# Altium PCB StLink.PcbDoc (part 3 of 3)
Units mm, origin at the board's own origin, x right, y up, seen from the top; angles counter-clockwise.
Board outline 13.1 x 14.6 mm, 6 copper layers (Top Layer, GND, VCC, S3, S4, Bottom Layer), stack 1.623 mm thick; 39 components, 26 nets, 150 pads, 52 vias.
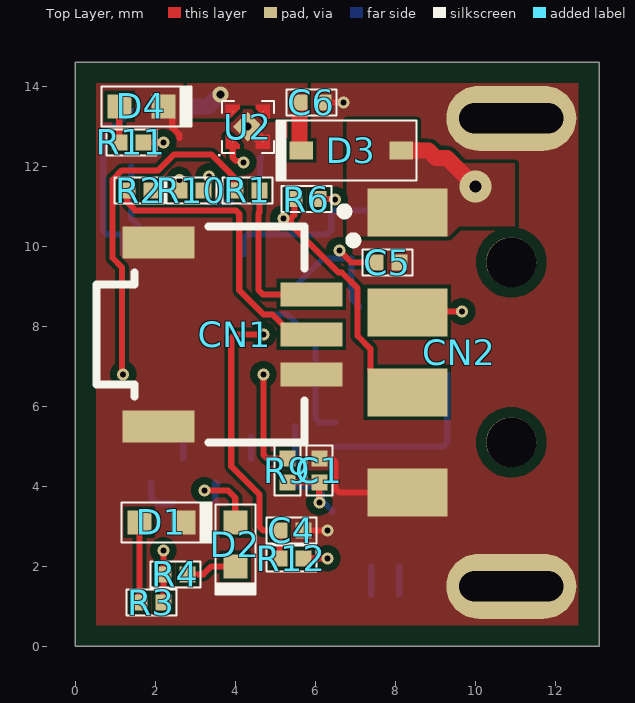
[diagram p0: Top Layer view]

## Via types
v1: diameter 0.3, hole 0.15, S4 to Bottom Layer, tented both sides, 11 vias
v2: diameter 0.3, hole 0.15, VCC to Bottom Layer, tented both sides, 8 vias
v3: diameter 0.3, hole 0.15, S3 to Bottom Layer, tented both sides, 7 vias
v4: diameter 0.3, hole 0.15, Top Layer to VCC, tented both sides, 7 vias
v5: diameter 0.3, hole 0.15, GND to Bottom Layer, tented both sides, 6 vias
v6: diameter 0.3, hole 0.15, Top Layer to Bottom Layer, tented both sides, 5 vias
v7: diameter 0.3, hole 0.15, Top Layer to S3, tented both sides, 4 vias
v8: diameter 0.3, hole 0.15, Top Layer to S4, tented both sides, 1 vias
v9: diameter 0.8, hole 0.3, Top Layer to Bottom Layer, tented both sides, 1 vias
v10: diameter 0.5, hole 0.2, Top Layer to Bottom Layer, tented both sides, 1 vias
v11: diameter 0.4, hole 0.2, Top Layer to Bottom Layer, tented both sides, 1 vias

## Nets (pads, with @x,y where several pads share a name; then routed paths per layer and width w, separated by ;. In a path a pad name is that pad's centre, name@x,y a point inside that pad or via, vN(x,y) a via of type N, cw(c..) or ccw(c..) an arc to the next point about the centre after c; other vN are vias at no path point) (continued)
pads on no net: CN2. U1.A1 U1.A3 U1.A4 U1.A5 U1.A6 U1.B1 U1.B3 U1.B5 U1.B6 U1.B7 U1.C3 U1.C4 U1.C5 U1.C6 U1.D3 U1.D8 U1.E2 U1.E3 U1.E7 U1.E8 U1.F2 U1.F3 U1.F5 U1.F6 U1.F7 U1.G3 U1.G4 U1.G5 U1.G7 U1.H2 U1.H3 U1.H4 U1.H5 U1.H6 U1.H7

## Polygon pours and split planes (outlines as drawn)
GND on Bottom Layer "GND_L06_P008" (solid, remove dead copper, pour order 8): 0.525,14.075 12.575,14.075 12.575,0.525 0.525,0.525
GND on Top Layer "GND_L01_P011" (solid, remove dead copper, pour order 11): 0.525,14.075 12.575,14.075 12.575,0.525 0.525,0.525
5V on Top Layer "5V_L01_P005" (solid, pour order 5): 2.8,14.075 3.75,14.075 3.75,13.2 2.8,13.2
5V on Top Layer "5V_L01_P001" (solid, pour order 1): 5.8,13.2 5.8,14.075 3.75,14.075 3.75,13.2 3.8,13.2 4.075,13.525 4.525,13.525 4.8,13.2
U5V on Top Layer "U5V_L01_P007" (solid, pour order 7): 6.791,13.146 8.516,13.146 8.541,13.146 8.541,12.6 8.642,12.6 9.171,12.071 10.991,12.071 10.991,10.5 9.595,10.5 9.345,10.25 6.791,10.25 6.791,11.496
3.3V on VCC (split plane): 12.59,0.51 0.51,0.51 0.51,11.051 0.52,11.053 0.536,11.064 0.547,11.08 0.551,11.1 0.551,11.849 1.1,11.849 1.12,11.853 1.136,11.864 2.121,12.849 2.879,12.849 3.364,12.364 3.38,12.353 3.4,12.349 4.6,12.349 4.62,12.353 4.636,12.364 5.021,12.749 6.2,12.749 6.22,12.753 6.236,12.764 6.247,12.78 6.251,12.8 6.251,14.09 12.59,14.09
U5V on VCC (split plane): 9.546,12.146 9.558,12.138 9.571,12.129 9.6,12.124 10.368,12.124 10.824,11.668 10.824,10.832 10.568,10.576 9.8,10.576 9.771,10.571 9.758,10.562 9.746,10.554 9.568,10.376 6.776,10.376 6.776,11.368 7.154,11.746 7.171,11.771 7.176,11.8 7.176,12.368 7.354,12.546 7.362,12.558 7.371,12.571 7.376,12.6 7.376,13.024 8.668,13.024
5V on VCC (split plane): 6.149,12.851 5,12.851 4.98,12.847 4.964,12.836 4.579,12.451 3.421,12.451 2.936,12.936 2.92,12.947 2.9,12.951 2.1,12.951 2.08,12.947 2.064,12.936 1.079,11.951 0.51,11.951 0.51,14.09 6.149,14.09
GND on GND (split plane): 12.59,0.51 0.51,0.51 0.51,14.09 12.59,14.09

## Other copper
VCC (plane layer: these items are gaps in the copper):
  lines w0.1: 0.5,11.1 0.5,11.9 1.1,11.9 2.1,12.9 2.9,12.9 3.4,12.4 4.6,12.4 5,12.8 6.2,12.8 6.2,14.1
  lines w0.15: 6.7,10.3 6.7,11.4 7.1,11.8 7.1,12.4 7.3,12.6 7.3,13.1 8.7,13.1 9.6,12.2 10.4,12.2 10.9,11.7 10.9,10.8 10.6,10.5 9.8,10.5 9.6,10.3 9.3,10.3 6.7,10.3

## Silkscreen, mask and mechanical layers (free items; w line width, h text height)
Board Outline:
  the board outline again, w0.3